# EAGLE board Lamp Logic Board_Combo (EAGLE 9.5.2)
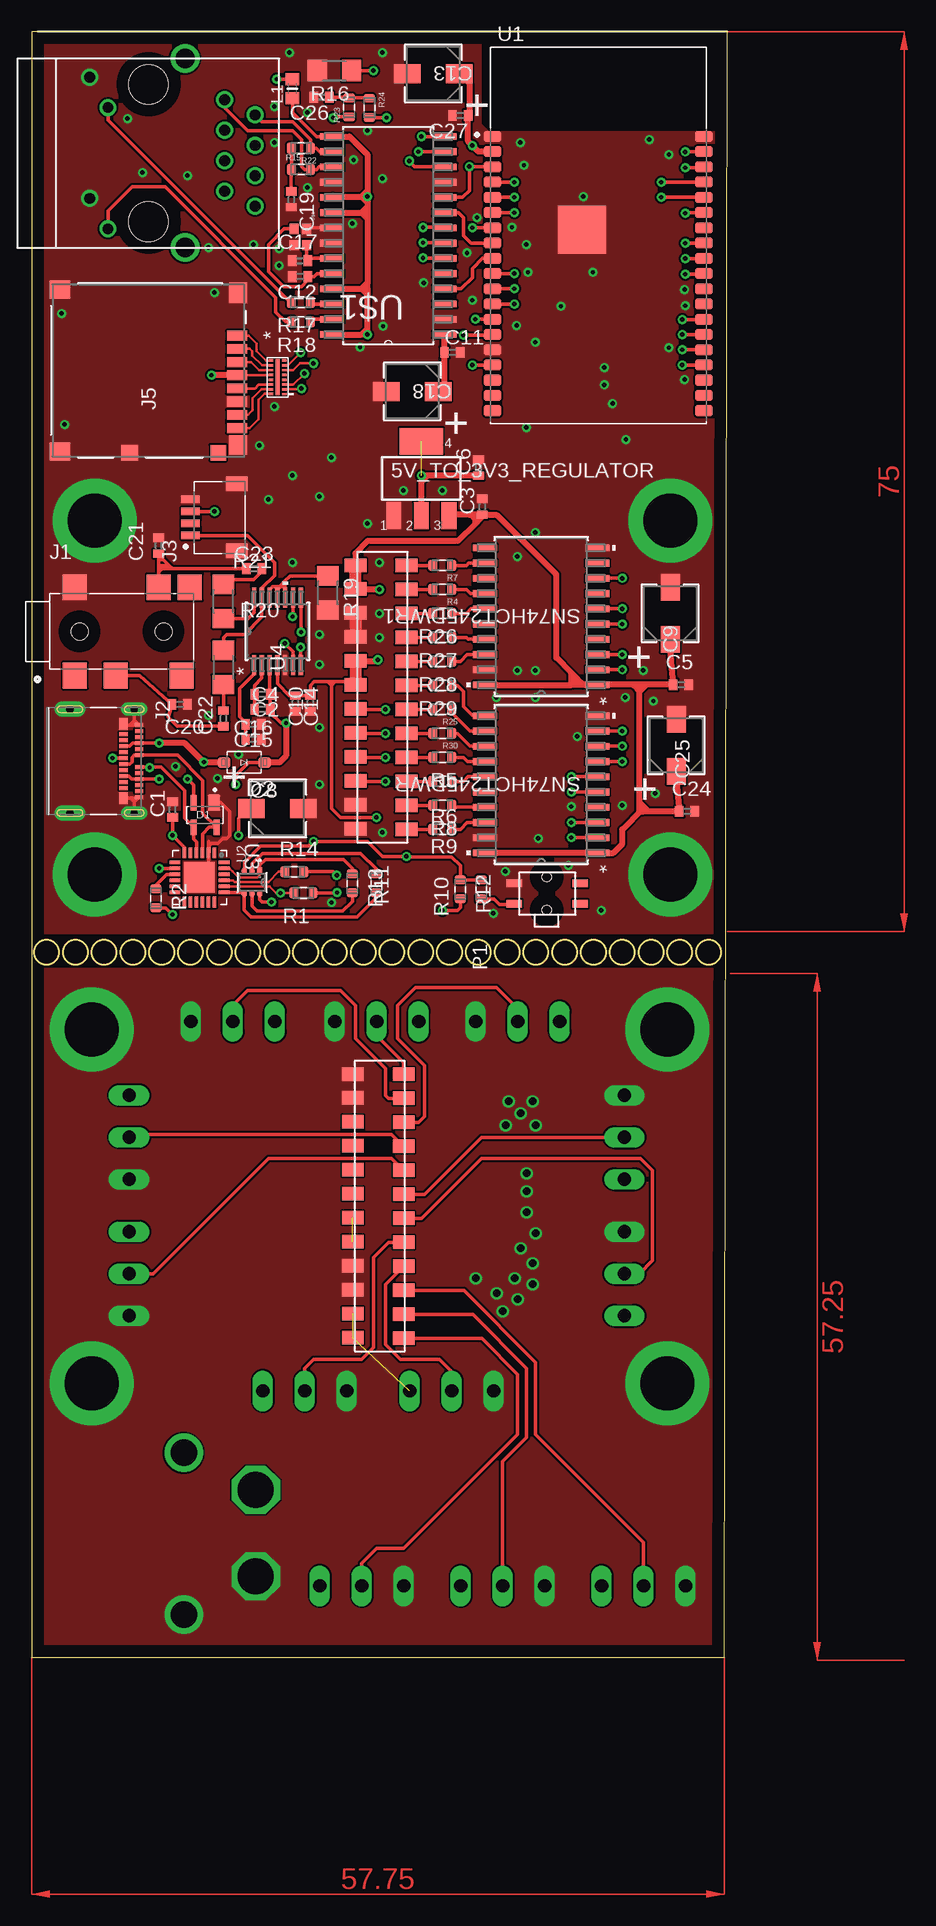
[diagram p0: board, top side]
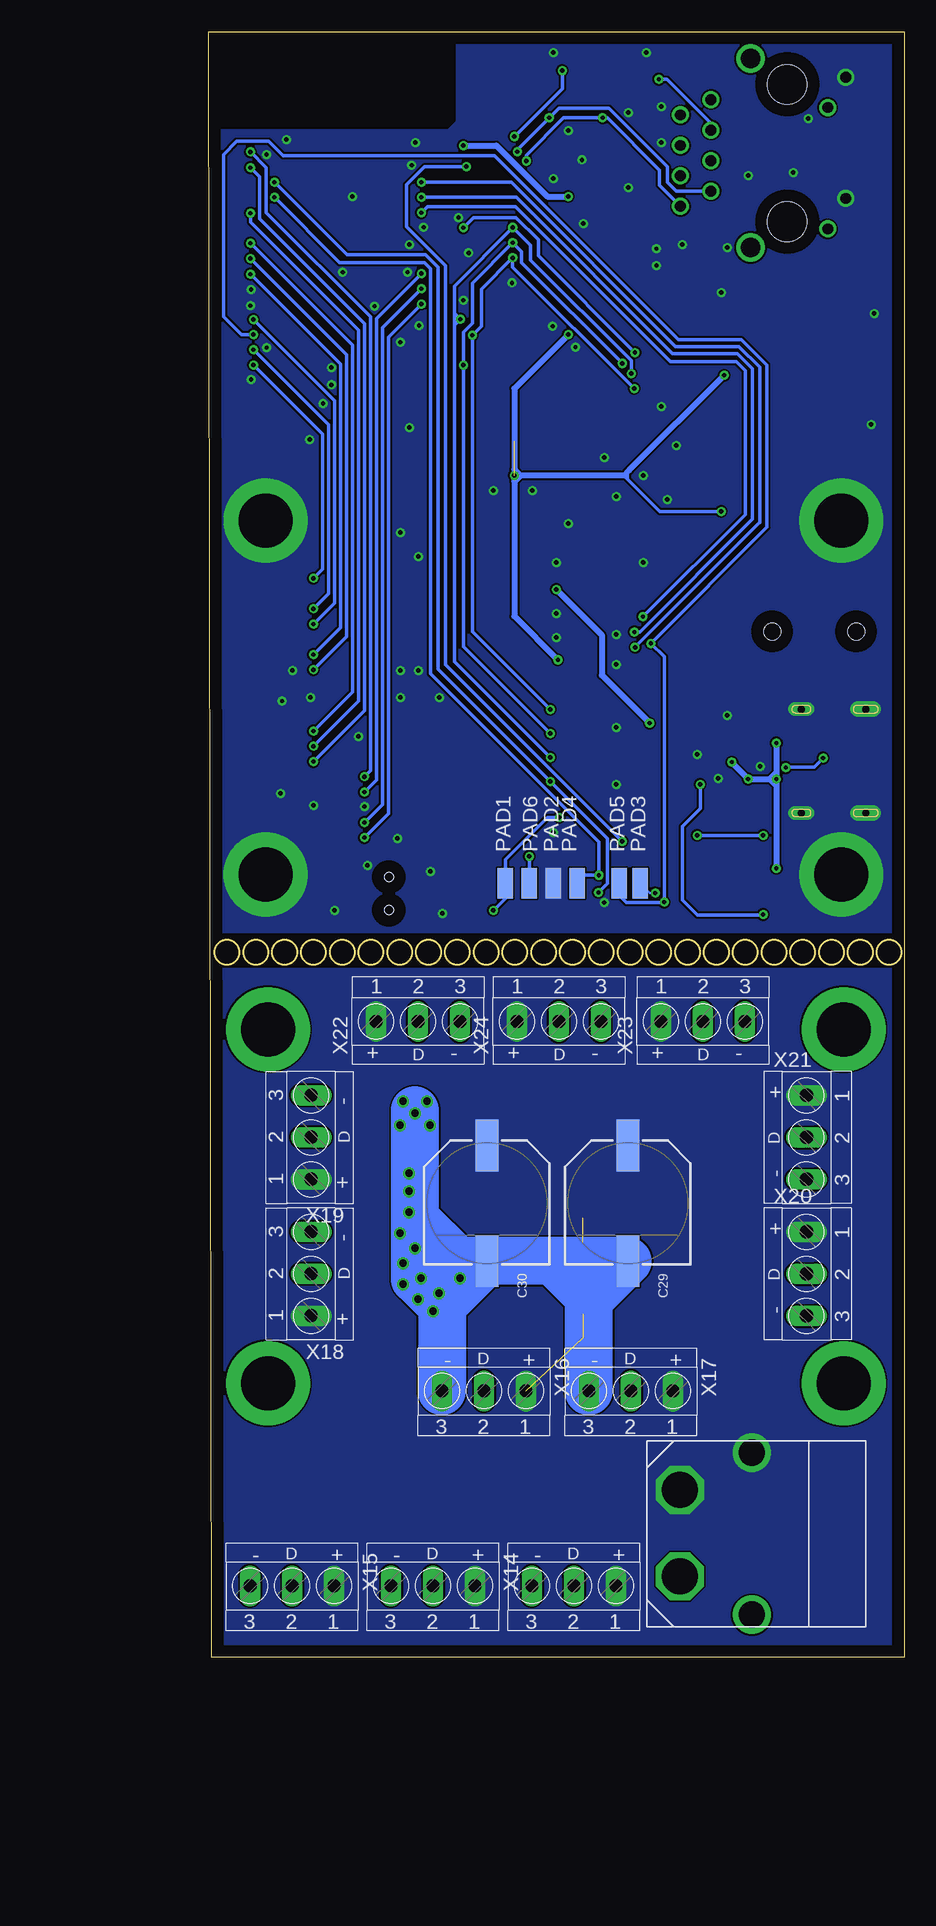
[diagram p1: board, bottom side, seen from below]

Size 58 x 135.5 mm. Coordinates in mm from the lower left corner, seen from the top.
Outline: 0,0 57.75,0 58,135.5 0,135.5 0,0
Copper layers (1*16): Top 0.035mm / dielectric 1.5mm / Bottom 0.035mm
Design rules "default": minimum track width 6mil, minimum drill 0.35mm, track to track 6mil, track to pad 6mil, pad to pad 6mil, via to via 6mil, smd to smd 6mil, copper to edge 40mil, drill to drill 6mil, minimum pad ring 10mil, minimum via ring 8mil, stop-mask expansion 4mil, vias tented up to drill 0mil, thermal gap 10mil
Net classes: 1 LED Data: width 0.305 mm, drill 0.25 mm
Milling: area 0.2,57.7 to 2.3,59.8; area 0.2,57.7 to 2.3,59.8; area 2.6,57.7 to 4.7,59.8; area 5,57.7 to 7.1,59.8; area 7.4,57.7 to 9.5,59.8; area 9.8,57.7 to 11.9,59.8; area 12.2,57.7 to 14.3,59.8; area 14.6,57.7 to 16.7,59.8; area 17,57.7 to 19.1,59.8; area 19.4,57.7 to 21.5,59.8; area 21.8,57.7 to 23.9,59.8; area 24.2,57.7 to 26.3,59.8; 13 more areas

## Footprints (pad centres in the part's own frame; a part is rotated, then mirrored left to right if it is on the bottom)
SOT223 = smd 1.219 x 2.235: 1 -2.311,-3.099; 2 0,-3.099; 3 2.311,-3.099 | smd 3.6 x 2.2: 4 0,3.099
C0402 = smd 0.7 x 0.9: 1 -0.65,0; 2 0.65,0
CAP_EEFC_B = smd 2.21 x 1.575: 1 -2.159,0; 2 2.159,0
CSV-G = smd 4.318 x 1.93: + -4.826,0; - 4.826,0
SOT143 = smd 0.99 x 1.3: 1 -0.76,-1.025 | smd 0.59 x 1.3: 2 0.96,-1.025; 3 0.96,1.025; 4 -0.96,1.025
SOD-123 = smd 1.02 x 0.86: A 1.68,0; C -1.68,0
CUI_SJ2-35894D-SMT-TR = smd 2 x 2.15: 1 -3.9,-3.675; 2 3.1,3.675; 3 -0.5,-3.675; 4 -3.9,3.675; 10 5.7,3.675; 11 5,-3.675 | hole 1.4: -3.5,0; 3.5,0
MOLEX_105450-0101 = smd 0.3 x 0.7: A1 -3,3.77; A2 -2.5,3.77; A3 -2,3.77; A4 -1.5,3.77; A5 -1,3.77; A6 -0.5,3.77; A7 0.5,3.77; A8 1,3.77; A9 1.5,3.77; A10 2,3.77; A11 2.5,3.77; A12 3,3.77; B2 2.25,2.47; B3 1.75,2.47; B4 1.25,2.47; B5 0.75,2.47; B6 0.25,2.47; B7 -0.25,2.47; B8 -0.75,2.47; B9 -1.25,2.47; B10 -1.75,2.47; B11 -2.25,2.47 | smd 1 x 0.7: B1 3.1,2.47; B12 -3.1,2.47 | drill 0.6 pad 1.1 long: S1 -4.32,3.36; S2 4.32,3.36 | drill 0.6 pad 1.3 long: S3 -4.32,-2; S4 4.32,-2
JST_SM04B-SRSS-TB(LF)(SN) = smd 0.6 x 1.55: 1 -1.5,0; 2 -0.5,0; 3 0.5,0; 4 1.5,0 | smd 1.2 x 1.8: S1 -2.8,-3.875; S2 2.8,-3.875
CON00218_8 = smd 0.813 x 1.676: 1 2.899,-7.387; 2 1.799,-7.387; 3 0.699,-7.387; 4 -0.401,-7.387; 5 -1.501,-7.387; 6 -2.601,-7.387; 7 -3.701,-7.387; 8 -4.801,-7.387 | smd 1.499 x 1.702: 9 -6.751,7.374; 10 6.751,7.374 | smd 1.295 x 1.397: 11 -6.859,1.577 | smd 1.295 x 1.295: 12 -6.859,-5.823 | smd 1.6 x 1.499: 13 -6.201,-7.476 | smd 1.702 x 1.499: 14 6.449,-7.476
L0603 = smd 1 x 1.1: 1 -0.794,0; 2 0.794,0
WIZNET_RB1-125BAG1A = drill 0.9: L1 6.325,-3.38; L2 3.784,-4.899; L3 -3.786,-3.379; L4 -6.325,-4.9 | drill 0.9 pad 1.3: R1 -4.446,6.349; R2 -3.176,8.889; R3 -1.906,6.349; R4 -0.636,8.889; R5 0.634,6.349; R6 1.904,8.889; R7 3.174,6.349; R8 4.444,8.889 | drill 1.6 pad 2.184: S1 -7.876,3.049; S2 7.874,3.049 | hole 3.3: 5.714,-0.001; -5.716,-0.001
SMD1,27-2,54 = smd 1.27 x 2.54: 1 0,0
RES_0603 = smd 0.74 x 0.93: 1 -0.795,0; 2 0.795,0
R1206 = smd 1.6 x 1.803: 1 -1.422,0; 2 1.422,0
DW20 = smd 1.981 x 0.559: 1 -4.686,5.715; 2 -4.686,4.445; 3 -4.686,3.175; 4 -4.686,1.905; 5 -4.686,0.635; 6 -4.686,-0.635; 7 -4.686,-1.905; 8 -4.686,-3.175; 9 -4.686,-4.445; 10 -4.686,-5.715; 11 4.686,-5.715; 12 4.686,-4.445; 13 4.686,-3.175; 14 4.686,-1.905; 15 4.686,-0.635; 16 4.686,0.635; 17 4.686,1.905; 18 4.686,3.175; 19 4.686,4.445; 20 4.686,5.715
XCVR_ESP32-WROVER-I = smd 1.45 x 0.93: 1 -8.81,8.26; 2 -8.81,6.99; 3 -8.81,5.72; 4 -8.81,4.45; 5 -8.81,3.18; 6 -8.81,1.91; 7 -8.81,0.64; 8 -8.81,-0.63; 9 -8.81,-1.9; 10 -8.81,-3.17; 11 -8.81,-4.44; 12 -8.81,-5.71; 13 -8.81,-6.98; 14 -8.81,-8.25; 15 -8.81,-9.52; 16 -8.81,-10.79; 17 -8.81,-12.06; 18 -8.81,-13.33; 19 -8.81,-14.6; 20 8.81,-14.6; 21 8.81,-13.33; 22 8.81,-12.06; 23 8.81,-10.79; 24 8.81,-9.52; 25 8.81,-8.25; 26 8.81,-6.98; 27 8.81,-5.71; 28 8.81,-4.44; 29 8.81,-3.17; 30 8.81,-1.9; 31 8.81,-0.63; 32 8.81,0.64; 33 8.81,1.91; 34 8.81,3.18; 35 8.81,4.45; 36 8.81,5.72; 37 8.81,6.99; 38 8.81,8.26 | smd 4 x 4: 39 -1.38,0.47
SILABS_CP2102N-A02-GQFN24R = smd 0.9 x 0.3: 1 -1.55,1.75; 2 -1.55,1.25; 3 -1.55,0.75; 4 -1.55,0.25; 5 -1.55,-0.25; 6 -1.55,-0.75; 13 2.55,-0.75; 14 2.55,-0.25; 15 2.55,0.25; 16 2.55,0.75; 17 2.55,1.25; 18 2.55,1.75 | smd 0.3 x 0.9: 7 -0.75,-1.55; 8 -0.25,-1.55; 9 0.25,-1.55; 10 0.75,-1.55; 11 1.25,-1.55; 12 1.75,-1.55; 19 1.75,2.55; 20 1.25,2.55; 21 0.75,2.55; 22 0.25,2.55; 23 -0.25,2.55; 24 -0.75,2.55 | smd 2.55 x 2.55: 25 0.5,0.5
SOT-363 = smd 0.6 x 0.42: 1 -0.95,0.65; 2 -0.95,0; 3 -0.95,-0.65; 4 0.95,-0.65; 5 0.95,0; 6 0.95,0.65
PW14 = smd 1.676 x 0.356: 1 -2.819,1.95; 2 -2.819,1.3; 3 -2.819,0.65; 4 -2.819,0; 5 -2.819,-0.65; 6 -2.819,-1.3; 7 -2.819,-1.95; 8 2.819,-1.95; 9 2.819,-1.3; 10 2.819,-0.65; 11 2.819,0; 12 2.819,0.65; 13 2.819,1.3; 14 2.819,1.95
SOIC127P1034X264-28N = smd 1.981 x 0.559: 1 -4.699,8.255; 2 -4.699,6.985; 3 -4.699,5.715; 4 -4.699,4.445; 5 -4.699,3.175; 6 -4.699,1.905; 7 -4.699,0.635; 8 -4.699,-0.635; 9 -4.699,-1.905; 10 -4.699,-3.175; 11 -4.699,-4.445; 12 -4.699,-5.715; 13 -4.699,-6.985; 14 -4.699,-8.255; 15 4.699,-8.255; 16 4.699,-6.985; 17 4.699,-5.715; 18 4.699,-4.445; 19 4.699,-3.175; 20 4.699,-1.905; 21 4.699,-0.635; 22 4.699,0.635; 23 4.699,1.905; 24 4.699,3.175; 25 4.699,4.445; 26 4.699,5.715; 27 4.699,6.985; 28 4.699,8.255
CM1624-08DE = smd 0.2 x 0.4: CLK 1.075,1.3; CMD 2.275,1.3; DATA0 0.675,1.3; DATA1 0.3,1.3; DATA2 3.075,1.3; DATA3 2.675,1.3; ESD1 1.475,1.3; ESD2 1.475,0.175; ESD3 1.875,0.175; SDCLK 1.075,0.175; SDCMD 2.275,0.175; SDDATA0 0.675,0.175; SDDATA1 0.275,0.175; SDDATA2 3.075,0.175; SDDATA3 2.675,0.175; VCC 1.875,1.3 | smd 3 x 0.35: GND 1.7,0.725
ECS-250-10-37B-CTN-TR = smd 0.85 x 0.75: 1 0.45,0.4; 2 1.8,0.4; 3 1.8,1.45; 4 0.45,1.45
QUICKFIT_RISER_THING = drill 4.5 pad 7: P$1 0,0
TL1014BF160QG = smd 1.27 x 0.635: P$1 0,0; P$2 5.5,0; P$3 0,-1.7; P$4 5.5,-1.7 | hole 0.75: 2.7,0.525; 2.7,-2.225
MY_HEADER = smd 1.12 x 1.83: P$1 -2,0; P$2 0.005,0; P$3 2.005,0; P$4 4.005,0; P$5 6.005,0; P$6 8.005,0; P$7 10.005,0; P$8 12.005,0; P$9 14.005,0; P$10 16.005,0; P$11 18.005,0; P$12 20.005,0; P$13 -2,-4.25; P$14 -0.045,-4.25; P$15 1.955,-4.25; P$16 3.955,-4.25; P$17 5.955,-4.25; P$18 7.955,-4.25; P$19 9.955,-4.25; P$20 11.955,-4.25; P$21 13.955,-4.25; P$22 15.955,-4.25; P$23 17.955,-4.25; P$24 19.955,-4.25
4,PIECE = drill 4.5 pad 7: P$1 0,0; P$2 48,29.5; P$3 0,29.5; P$4 48,0
XT60 = drill 3 octagon: + 4.1,2.75; - 11.3,2.75 | drill 2.184 pad 2.438: +_HOLE 1,8.75 | drill 2.184 pad 2.413: -_HOLE 14.5,8.75
TERMINAL-BLOCK-3-PIN-3.5MM-LONG-PAD = drill 1.1 pad 1.7 long: 1 -3.5,-0.1; 2 0,-0.1; 3 3.5,-0.1

## Placement (x,y rotation side)
5V_TO_3V3_REGULATOR  [SOT223]  32.5,98.25 0 top
C1  0.1uF  [C0402]  11.76,70.64 90 top
C2  1uF  [C0402]  19.25,79 0 top
C3  1uF  [C0402]  37.58,95.88 90 top
C4  0.1uF  [C0402]  19.25,80.25 0 top
C5  0.1uF  [C0402]  54.15,81.05 0 top
C6  1uF  [C0402]  37.26,99.13 90 top
C8  1uF  [CAP_EEFC_B]  20.5,70.75 0 top
C9  1uF  [CAP_EEFC_B]  53.25,87 90 top
C10  1uF  [C0402]  22,79.5 270 top
C11  10uF  [C0402]  35.08,108.76 0 top
C12  6pF  [C0402]  22.4,115.08 180 top
C13  100uF  [CAP_EEFC_B]  33.5,132 180 top
C14  0.1uF  [C0402]  23.25,79.5 270 top
C15  1uF  [C0402]  18.5,76.5 180 top
C16  0.1uF  [C0402]  18.5,77.75 180 top
C17  6pF  [C0402]  22.39,116.39 180 top
C18  100uF  [CAP_EEFC_B]  31.75,105.5 180 top
C19  0.1uF  [C0402]  21.66,121.51 270 top
C20  0.1uF  [C0402]  12.36,79.42 0 top
C21  0.1uF  [C0402]  10.59,92.64 90 top
C22  1uF  [C0402]  16,78.25 90 top
C23  1uF  [C0402]  18.55,90.72 0 top
C24  0.1uF  [C0402]  54.65,70.5 0 top
C25  1uF  [CAP_EEFC_B]  53.75,76 90 top
C26  0.1uF  [C0402]  24.18,130.03 180 top
C27  1uF  [C0402]  35.75,128.5 180 top
C29  1000uF  [CSV-G]  23.04,37.83 270 bottom
C30  1000uF  [CSV-G]  34.79,37.83 270 bottom
D1  SP0503BAHTG  [SOT143]  14.47,70.2 180 top
D2  STPS1L60ZFY  [SOD-123]  17.74,74.58 180 top
J1  SJ2-35894D-SMT-TR  [CUI_SJ2-35894D-SMT-TR]  7.5,85.5 0 top
J2  105450-0101  [MOLEX_105450-0101]  5.2,74.69 270 top
J3  SM04B-SRSS-TB(LF)(SN)  [JST_SM04B-SRSS-TB(LF)(SN)]  13.25,95 90 top
J5  LLC  [CON00218_8]  9.75,107.25 90 top
L1  EXC3BP  [L0603]  21.75,130.75 90 top
P1  RB1-125BAG1A  [WIZNET_RB1-125BAG1A]  9.75,125.38 270 top
PAD1  VCC  [SMD1,27-2,54]  33.25,64.5 0 bottom
PAD2  GND  [SMD1,27-2,54]  29.25,64.5 0 bottom
PAD3  TX  [SMD1,27-2,54]  22,64.5 0 bottom
PAD4  RX  [SMD1,27-2,54]  27.25,64.5 0 bottom
PAD5  DTR  [SMD1,27-2,54]  23.75,64.5 0 bottom
PAD6  RTS  [SMD1,27-2,54]  31.25,64.5 0 bottom
R1  330  [RES_0603]  22.68,63.7 180 top
R2  12k  [RES_0603]  10.38,63.25 270 top
R4  330  [RES_0603]  34.25,89 180 top
R5  330  [RES_0603]  34.25,75 180 top
R6  330  [RES_0603]  34.25,73 180 top
R7  330  [RES_0603]  34.25,91 180 top
R8  330  [RES_0603]  34.25,71 180 top
R9  330  [RES_0603]  34.25,69 180 top
R10  330  [RES_0603]  37.5,64 270 top
R11  12k  [RES_0603]  28.75,64.5 270 top
R12  12k  [RES_0603]  35.75,64 270 top
R13  12k  [RES_0603]  26.75,64.5 270 top
R14  330  [RES_0603]  21.91,65.47 0 top
R15  330  [RES_0603]  22.47,124 0 top
R16  2.32k  [R1206]  25.25,132.25 180 top
R17  330  [RES_0603]  22.46,112.94 180 top
R18  330  [RES_0603]  22.47,111.3 180 top
R19  10k  [R1206]  24.71,88.7 270 top
R20  75  [R1206]  16,82.5 90 top
R21  75  [R1206]  16,88 270 top
R22  330  [RES_0603]  22.47,125.78 180 top
R23  330  [RES_0603]  26.48,129.18 90 top
R24  330  [RES_0603]  28.18,129.15 270 top
R25  330  [RES_0603]  34.25,79 180 top
R26  330  [RES_0603]  34.25,87 180 top
R27  330  [RES_0603]  34.25,85 180 top
R28  330  [RES_0603]  34.25,83 180 top
R29  330  [RES_0603]  34.25,81 180 top
R30  330  [RES_0603]  34.25,77 180 top
SN74HCT245DWR  SN74HCT245DWR  [DW20]  42.5,72.75 180 top
SN74HCT245DWR1  SN74HCT245DWR  [DW20]  42.5,86.75 180 top
U1  ESP32-WROVER-IB  [XCVR_ESP32-WROVER-I]  47.25,118.5 0 top
U2  CP2102N-A02-GQFN24R  [SILABS_CP2102N-A02-GQFN24R]  13.5,65.5 270 top
U3  MMDT3904-7-F  [SOT-363]  18.38,64.59 270 top
U4  PCM1808PWR  [PW14]  20.5,85.5 90 top
U$1  ENC28J60/SO  [SOIC127P1034X264-28N]  29.75,118.5 180 top
U$2  CM1624-08DE  [CM1624-08DE]  21.25,105 90 top
U$3  ECS-250-10-37B-CTN-TR  [ECS-250-10-37B-CTN-TR]  21.5,119.5 270 top
U$4  QUICKFIT_RISER_THING  [QUICKFIT_RISER_THING]  5.25,65.25 0 top
U$5  QUICKFIT_RISER_THING  [QUICKFIT_RISER_THING]  5.25,94.75 0 top
U$6  QUICKFIT_RISER_THING  [QUICKFIT_RISER_THING]  53.25,94.75 0 top
U$7  TL1014BF160QG  [TL1014BF160QG]  40.25,64.5 0 top
U$8  QUICKFIT_RISER_THING  [QUICKFIT_RISER_THING]  53.25,65.25 0 top
U$9  MY_HEADER  [MY_HEADER]  31.25,89 270 top
U$13,U$14  POWERBOARD_TEMPLATEPOWERBOARD_TEMPLATE  [4,PIECE]  5.04,52.33 180 bottom
U$14  MY_HEADER  [MY_HEADER]  31.04,46.58 270 top
U$15  XT60  [XT60]  21.45,18.04 270 bottom
X13  TERMINAL-BLOCK-3.5MM-3-PIN-LONG-PAD  [TERMINAL-BLOCK-3-PIN-3.5MM-LONG-PAD]  27.54,5.83 180 bottom
X14  TERMINAL-BLOCK-3.5MM-3-PIN-LONG-PAD  [TERMINAL-BLOCK-3-PIN-3.5MM-LONG-PAD]  39.29,5.83 180 bottom
X15  TERMINAL-BLOCK-3.5MM-3-PIN-LONG-PAD  [TERMINAL-BLOCK-3-PIN-3.5MM-LONG-PAD]  51.04,5.83 180 bottom
X16  TERMINAL-BLOCK-3.5MM-3-PIN-LONG-PAD  [TERMINAL-BLOCK-3-PIN-3.5MM-LONG-PAD]  35.04,22.08 180 bottom
X17  TERMINAL-BLOCK-3.5MM-3-PIN-LONG-PAD  [TERMINAL-BLOCK-3-PIN-3.5MM-LONG-PAD]  22.79,22.08 180 bottom
X18  TERMINAL-BLOCK-3.5MM-3-PIN-LONG-PAD  [TERMINAL-BLOCK-3-PIN-3.5MM-LONG-PAD]  49.54,31.96 90 bottom
X19  TERMINAL-BLOCK-3.5MM-3-PIN-LONG-PAD  [TERMINAL-BLOCK-3-PIN-3.5MM-LONG-PAD]  49.54,43.33 90 bottom
X20  TERMINAL-BLOCK-3.5MM-3-PIN-LONG-PAD  [TERMINAL-BLOCK-3-PIN-3.5MM-LONG-PAD]  8.04,31.96 270 bottom
X21  TERMINAL-BLOCK-3.5MM-3-PIN-LONG-PAD  [TERMINAL-BLOCK-3-PIN-3.5MM-LONG-PAD]  8.04,43.33 270 bottom
X22  TERMINAL-BLOCK-3.5MM-3-PIN-LONG-PAD  [TERMINAL-BLOCK-3-PIN-3.5MM-LONG-PAD]  40.54,53.08 0 bottom
X23  TERMINAL-BLOCK-3.5MM-3-PIN-LONG-PAD  [TERMINAL-BLOCK-3-PIN-3.5MM-LONG-PAD]  16.79,53.08 0 bottom
X24  TERMINAL-BLOCK-3.5MM-3-PIN-LONG-PAD  [TERMINAL-BLOCK-3-PIN-3.5MM-LONG-PAD]  28.79,53.08 0 bottom

## Library data of the parts
5V_TO_3V3_REGULATOR = lm1117; MF: Texas Instruments; MPN: LM1117MP-1.8; OC_FARNELL: 1469053; OC_NEWARK: 41K3467
C1-C4 C6 C10-C12 C14-C17 C19 C22 C23 C26 C27 R16 R19-R21 = resistor
C5 C20 C21 C24 = adafruit
C8 C9 C13 C18 C25 = EEE-FC1V1R0R; MANUFACTURER_PART_NUMBER: EEEFC1V1R0R; VENDOR: Panasonic
C29 C30 = rc-master-smd
D1 = SP0503BAHTG; DESCRIPTION: SP050xBA Series 8 V 30 pF Uni-Directional SMT TVS Avalanche Diode Array SOT-143; DIGI-KEY_PART_NUMBER: F2715CT-ND; DIGI-KEY_PURCHASE_URL: https://www.digikey.com/product-detail/en/littelfuse-inc/SP0503BAHTG/F2715CT-ND/1154322?utm_source=snapeda&utm_medium=aggregator&utm_campaign=symbol; MF: Littelfuse Inc.; MP: SP0503BAHTG; PACKAGE: SOT-143 Littelfuse
D2 = Diodes; CREATED_BY: PCBLayout.com; DIGIKEY_PART_NUMBER: MBR0520LT1GOSTR-ND; MANUFACTURER: ON Semiconductor; MPN: MBR0520LT1G; PACKAGE: SOD-123
J1 = SJ2-35894D-SMT-TR; CUI_PURCHASE_URL: https://www.cui.com/product/interconnect/connectors/audio-connectors/jacks/sj2-3589x-smt-series?utm_source=snapeda.com&utm_medium=referral&utm_campaign=snapedaBOM; DESCRIPTION: 3.5 mm, Stereo, Right Angle, Surface Mount _SMT_, Audio Jack Connector; DIGI-KEY_PART_NUMBER: CP-SJ2-35894D-SMT-CT-ND; DIGI-KEY_PURCHASE_URL: https://www.digikey.com/product-detail/en/cui-inc/SJ2-35894D-SMT-TR/CP-SJ2-35894D-SMT-CT-ND/6619623?utm_source=snapeda&utm_medium=aggregator&utm_campaign=symbol; MF: CUI Inc.; MP: SJ2-35894D-SMT-TR; PACKAGE: None
J2 = 105450-0101; DESCRIPTION: USB Shielded I/O Receptacle; Type C; Right Angle; Surface Mount; Gold over Nickel; DIGI-KEY_PART_NUMBER: WM12856CT-ND; DIGI-KEY_PURCHASE_URL: https://www.digikey.com/product-detail/en/molex/1054500101/WM12856CT-ND/5843891?utm_source=snapeda&utm_medium=aggregator&utm_campaign=symbol; MF: Molex; MP: 1054500101; PACKAGE: None
J3 = SM04B-SRSS-TB_LF__SN_; AVAILABILITY: Unavailable; DESCRIPTION: SH Series 1.0 mm Pitch 2 Position Single Row Side Entry Shrouded Header; MF: JST Sales; MP: SM04B-SRSS-TB_LF__SN_; PACKAGE: None; PRICE: None
J5 = 5027740891; MANUFACTURER_PART_NUMBER: LLC; VENDOR: Molex Connector Corporation
L1 = ferrite
P1 = RB1-125BAG1A; AVAILABILITY: Unavailable; DESCRIPTION: Accessory RJ-45 With Transformer Connector - UDE; MF: WIZnet; MP: RB1-125BAG1A; PACKAGE: HVQFN-36 NXP Semiconductors; PRICE: None
PAD1-PAD6 = wirepad
R1 R2 R4-R15 R17 R18 R22-R30 = Resistor_Capacitor; CREATED_BY: PCBLayout.com; DIGIKEY_PART_NUMBER: 311-0.0GRTR-ND; MANUFACTURER: Yageo; MPN: RC0603JR-070RL; PACKAGE: SMD 0603
SN74HCT245DWR SN74HCT245DWR1 = SN74HCT245DWR ; MANUFACTURER_PART_NUMBER: SN74HCT245DWR; VENDOR: Texas Instruments
U1 = ESP32-WROVER-I; AVAILABILITY: Unavailable; DESCRIPTION: Module: combo; GPIO, I2C x2, I2S x2, SDIO, SPI x3, UART x3; U.FL; MF: Espressif Systems; MP: ESP32-WROVER-I; PACKAGE: Module Espressif Systems; PRICE: None
U2 = CP2102N-A02-GQFN20R
U3 = MMDT3904; MANUFACTURER_PART_NUMBER: MMDT39047F; VENDOR: Diodes Inc
U4 = PCM1808PWR; MANUFACTURER_PART_NUMBER: PCM1808PWR; VENDOR: Texas Instruments
U$1 = ENC28J60_SO; DESCRIPTION: ENC28J60 Series 3.3 V Stand-Alone Ethernet Controller with SPI Interface-SSOP-28; DIGI-KEY_PART_NUMBER: ENC28J60/SS-ND; DIGI-KEY_PURCHASE_URL: https://www.digikey.com/product-detail/en/microchip-technology/ENC28J60-SS/ENC28J60-SS-ND/857584?utm_source=snapeda&utm_medium=aggregator&utm_campaign=symbol; MF: Microchip; MP: ENC28J60/SS; PACKAGE: SSOP-28 Microchip
U$2 = CM1624-08DE
U$3 = ECS-250-10-37B-CTN-TR
U$4-U$6 U$8 U$13,U$14 = QUICKFIT_RISER_THING
U$7 = TL1014BF160QG
U$9 U$14 = MY_HEADER
U$15 = XT60
X13-X24 = Rembrandt Electronics - Terminal Block 3-5mm v1-0

## Nets
BCK [LED Data]: U1.5 U4.8
CT [LED Data]: L1.2 P1.R3
D+ [LED Data]: D1.4 J2.A6 J2.B6 U2.3
D- [LED Data]: D1.3 J2.A7 J2.B7 U2.4
DOUT [LED Data]: U1.6 U4.9
DTR [LED Data]: R13.1 U2.23 U3.1
EN [LED Data]: PAD6.1 R10.1 R12.1 U1.3 U3.3 U$1.10
ETHER_CS [LED Data]: U1.8 U$1.9
ETHER_INT [LED Data]: U1.9 U$1.4
GND: 5V_TO_3V3_REGULATOR.1 C1.2 C3.2 C5.2 C6.2 C8.2 C9.2 C10.2 C11.2 C12.2 C13.2 C14.2 C15.1 C16.1 C17.2 C18.2 C19.2 C20.2 C21.2 C24.2 C25.2 C26.2 C27.2 D1.1 J1.4 J2.A1 J2.A12 J2.B1 J2.B12 J2.S1 J2.S2 J2.S3 J2.S4 J3.4 J3.S1 J3.S2 J5.6 J5.9 J5.10 J5.11 J5.13 J5.14 P1.L2 P1.L4 PAD2.1 R16.2 R19.2 SN74HCT245DWR1.10 SN74HCT245DWR1.19 SN74HCT245DWR.10 SN74HCT245DWR.19 U1.1 U1.15 U1.38 U1.39 U2.2 U2.25 U4.5 U$1.2 U$1.11 U$1.18 U$1.21 U$1.22 U$3.2 U$3.4 U$4.P$1 U$5.P$1 U$6.P$1 U$7.P$1 U$8.P$1 U$9.P$15 U$9.P$16 U$9.P$23 U$9.P$24
GND_BRD: C29.- C30.- U$13,U$14.P$1 U$13,U$14.P$2 U$13,U$14.P$3 U$13,U$14.P$4 U$14.P$13 U$14.P$14 U$14.P$21 U$14.P$22 U$15.- U$15.-_HOLE X13.3 X14.3 X15.3 X16.3 X17.3 X18.3 X19.3 X20.3 X21.3 X22.3 X23.3 X24.3
HEADER_CS [LED Data]: R1.1 U1.35 U$9.P$22
HEADER_CS_BRD: U$14.P$15
LEDA [LED Data]: P1.L1 R18.2
LEDB [LED Data]: P1.L3 R17.2
LEDS1_3V3 [LED Data]: SN74HCT245DWR1.8 U1.23
LEDS1_5V [LED Data]: R7.2 U$9.P$1
LEDS1_5V_BRD: U$14.P$12 X13.2
LEDS2_3V3 [LED Data]: SN74HCT245DWR1.6 U1.24
LEDS2_5V [LED Data]: R4.2 U$9.P$2
LEDS2_5V_BRD: U$14.P$11 X14.2
LEDS3_3V3 [LED Data]: SN74HCT245DWR1.5 U1.26
LEDS3_5V [LED Data]: R26.2 U$9.P$3
LEDS3_5V_BRD: U$14.P$10 X15.2
LEDS4_3V3 [LED Data]: SN74HCT245DWR1.3 U1.29
LEDS4_5V [LED Data]: R27.2 U$9.P$4
LEDS4_5V_BRD: U$14.P$9 X16.2
LEDS5_3V3 [LED Data]: SN74HCT245DWR1.2 U1.30
LEDS5_5V [LED Data]: R28.2 U$9.P$5
LEDS5_5V_BRD: U$14.P$8 X17.2
LEDS6_3V3 [LED Data]: SN74HCT245DWR.9 U1.31
LEDS6_5V [LED Data]: R29.2 U$9.P$6
LEDS6_5V_BRD: U$14.P$7 X18.2
LEDS7_3V3 [LED Data]: SN74HCT245DWR.8 U1.33
LEDS7_5V [LED Data]: R25.2 U$9.P$7
LEDS7_5V_BRD: U$14.P$6 X19.2
LEDS8_3V3 [LED Data]: SN74HCT245DWR.7 U1.36
LEDS8_5V [LED Data]: R30.2 U$9.P$8
LEDS8_5V_BRD: U$14.P$5 X20.2
LEDS9_3V3 [LED Data]: SN74HCT245DWR.6 U1.37
LEDS9_5V [LED Data]: R5.2 U$9.P$9
LEDS9_5V_BRD: U$14.P$4 X21.2
LEDS10_3V3 [LED Data]: SN74HCT245DWR.5 U1.10
LEDS10_5V [LED Data]: R6.2 U$9.P$10
LEDS10_5V_BRD: U$14.P$3 X22.2
LEDS11_3V3 [LED Data]: SN74HCT245DWR.3 U1.11
LEDS11_5V [LED Data]: R8.2 U$9.P$11
LEDS11_5V_BRD: U$14.P$2 X23.2
LEDS12_3V3 [LED Data]: SN74HCT245DWR.2 U1.12
LEDS12_5V [LED Data]: R9.2 U$9.P$12
LEDS12_5V_BRD: U$14.P$1 X24.2
LEFT_CHANNEL [LED Data]: R21.2 U4.14
LRCK [LED Data]: U1.4 U4.7
MIC [LED Data]: J1.1
MISO [LED Data]: U1.14 U$1.6 U$2.SDDATA0 U$9.P$19
MISO_BRD: U$14.P$18
MOSI [LED Data]: U1.16 U$1.7 U$2.SDCMD U$9.P$20
MOSI_BRD: U$14.P$17
N$1 [LED Data]: R9.1 SN74HCT245DWR.18
N$2 [LED Data]: C2.1 C4.1 U4.2
N$3 [LED Data]: C20.1 C22.1 J1.3
N$4 [LED Data]: C21.1 C23.1 J1.2
N$5 [LED Data]: C1.1 C8.1 U2.6
N$6 [LED Data]: R7.1 SN74HCT245DWR1.12
N$7 [LED Data]: R11.1 U3.2
N$8 [LED Data]: R13.2 U3.5
N$9: R10.2 U$7.P$3
N$10 [LED Data]: R28.1 SN74HCT245DWR1.18
N$11 [LED Data]: R6.1 SN74HCT245DWR.15
N$12 [LED Data]: R5.1 SN74HCT245DWR.14
N$13 [LED Data]: R27.1 SN74HCT245DWR1.17
N$14 [LED Data]: R8.1 SN74HCT245DWR.17
N$15 [LED Data]: R26.1 SN74HCT245DWR1.15
N$16 [LED Data]: C22.2 R20.1
N$17 [LED Data]: C15.2 C16.2 U4.1
N$18 [LED Data]: R14.1 U2.21
N$19 [LED Data]: C11.1 C18.1 U$1.1
N$20 [LED Data]: R16.1 U$1.14
N$21 [LED Data]: C12.1 U$1.24 U$3.1
N$22 [LED Data]: C17.1 U$1.23 U$3.3
N$23 [LED Data]: R17.1 U$1.26
N$24 [LED Data]: C23.2 R21.1
N$25 [LED Data]: R18.1 U$1.27
N$26 [LED Data]: R29.1 SN74HCT245DWR.11
N$27 [LED Data]: R4.1 SN74HCT245DWR1.14
N$28 [LED Data]: R2.1 U2.9
N$30 [LED Data]: R19.1 U4.10 U4.11 U4.12
N$31 [LED Data]: C26.1 R23.2 R24.1
N$32 [LED Data]: C19.1 R15.1 R22.2
N$34 [LED Data]: R30.1 SN74HCT245DWR.13
N$35 [LED Data]: R25.1 SN74HCT245DWR.12
RIGHT_CHANNEL [LED Data]: J3.1 R20.2 U4.13
RIGHT_GAIN [LED Data]: J3.2
RTS [LED Data]: R11.2 U2.19 U3.4
RX0 [LED Data]: PAD4.1 R14.2 U1.34
SCK [LED Data]: U1.13 U$1.8 U$2.SDCLK U$9.P$21
SCK_BRD: U$14.P$16
SCKI [LED Data]: PAD5.1 U1.25 U3.6 U4.6
SD_CMD [LED Data]: J5.3 U$2.CMD
SD_CS [LED Data]: U1.7 U$2.SDDATA3
SD_D0 [LED Data]: J5.7 U$2.DATA0
SD_D1 [LED Data]: J5.8 U$2.DATA1
SD_D2 [LED Data]: J5.1 U$2.DATA2
SD_D3 [LED Data]: J5.2 U$2.DATA3
SD_SCK [LED Data]: J5.5 U$2.CLK
TPIN+ [LED Data]: P1.R7 R24.2 U$1.13
TPIN- [LED Data]: P1.R8 R23.1 U$1.12
TPOUT+ [LED Data]: P1.R1 R15.2 U$1.17
TPOUT- [LED Data]: P1.R2 R22.1 U$1.16
TX_CONTROLLER [LED Data]: PAD3.1 R1.2 U2.20
VDD3V3: 5V_TO_3V3_REGULATOR.2 5V_TO_3V3_REGULATOR.4 C6.1 C10.1 C13.1 C14.1 C27.1 J3.3 J5.4 L1.1 PAD1.1 R12.2 U1.2 U4.4 U$1.15 U$1.19 U$1.20 U$1.25 U$1.28 U$2.VCC U$9.P$17 U$9.P$18
VDD3V3_BRD: U$14.P$19 U$14.P$20
VDD5V: 5V_TO_3V3_REGULATOR.3 C2.2 C3.1 C4.2 C5.1 C9.1 C24.1 C25.1 D2.C R2.2 SN74HCT245DWR1.1 SN74HCT245DWR1.20 SN74HCT245DWR.1 SN74HCT245DWR.20 U4.3 U$9.P$13 U$9.P$14
VDD5V_BRD: C29.+ C30.+ U$14.P$23 U$14.P$24 U$15.+ U$15.+_HOLE X13.1 X14.1 X15.1 X16.1 X17.1 X18.1 X19.1 X20.1 X21.1 X22.1 X23.1 X24.1
VDD5VUSB: D1.2 D2.A J2.A4 J2.A9 J2.B4 J2.B9 U2.8
VREGIN [LED Data]: U2.7

## Tracks (layer width: path | path; a pad name or v marks a point on that pad's centre or on a via)
BCK  (via drill 0.35)
  Top 0.305: U1.5 v40.25,121.68 | v22.48,85.45 22.48,88.29 U4.8
  Bottom 0.305: v40.25,121.68 32.33,121.68 19.3,108.65 13.9,108.65 12.65,107.4 12.65,94.85 22.05,85.45 v22.48,85.45
CT  (via drill 0.35 pad 0.4)
  Top 0.305: L1.2 v20.44,131.53
  Bottom 0.305: P1.R3 16.1,127.85 19.78,131.53 v20.44,131.53
D+
  Top 0.305: U2.3 14.25,68.63 14.8,69.18 D1.4 14.28,70.32 14.28,73.07 12.17,75.19 J2.A6 8.56,75.19 8.37,75 8.37,74.62 8.19,74.44 J2.B6
D-  (via drill 0.35)
  Top 0.305: U2.4 13.75,67.93 13.51,68.18 D1.3 12.76,69.93 12.76,72.24 10.81,74.19 J2.A7 9.81,74.19 v9.85,74.15 | J2.B7 v6.75,74.94
  Bottom 0.305: v6.75,74.94 7.5,74.19 9.81,74.19 v9.85,74.15
DOUT  (via drill 0.35)
  Top 0.305: U1.6 v40.25,120.41 | U4.9 21.82,88.3 21.82,86.78 v21.77,86.73
  Bottom 0.305: v40.25,120.41 39.75,120.91 32.41,120.91 19.5,108 14,108 13.25,107.25 13.25,95.25 v21.77,86.73
DTR
  Top 0.2: 16.75,65.5 | U2.23 16.51,65.75 16.75,65.5 | 16.75,65.5 17.27,64.98 18.82,64.98 19.03,65.19 U3.1
  Top 0.305: U3.1 19.03,66.04 19.5,66.5 26,66.5 26.75,65.75 R13.1
EN  (via drill 0.35, 0.35 pad 0.4)
  Top 0.305: U$1.10 35.92,121.67 36.5,122.25 v36.5,124.25 36.53,124.22 U1.3 | U3.3 17.75,65.56 17.75,66.25 19.1,67.6 23.1,67.6 v23.5,68 28,68 29.25,66.75 v31.25,66.75 31.29,66.71 35.03,66.71 35.75,65.98 R12.1 R10.1
  Bottom 0.305: v23.5,68 38.25,82.75 38.25,116 41.5,119.25 41.5,122.71 39.96,124.25 v36.5,124.25 | PAD6.1 v31.25,66.75
ETHER_CS
  Top 0.305: U$1.9 35.59,120.41 36,120 36,118.5 36.63,117.87 U1.8
ETHER_INT
  Top 0.305: U$1.4 35.8,114.06 36.75,115 36.75,115.75 37.6,116.6 U1.9
GND  (via drill 0.35, 0.35 pad 0.4)
  Top 0.305: U$1.21 23.04,119.13 U$3.4 | 8.56,71.28 J2.A12 8.87,71.59 J2.B1 8.25,71.59 8.56,71.28 | 8.56,71.28 J2.S2 | 8.5,77.69 J2.A1 8.56,78.1 | 8.5,77.69 8.25,77.69 | 8.25,77.69 7.77,77.69 J2.B12 | 8.56,78.1 J2.S1 | 8.5,78.04 8.25,77.79 8.25,77.69 | 8.56,78.1 8.5,78.04 | 8.5,78.04 8.5,77.69 | U2.2 14.75,65.75 U2.25 | U2.2 14.75,68 | U2.2 14.79,67.09 14.79,67.63 14.97,67.81 15.51,67.81 15.95,68.25 16.25,68.25 16.5,68.5 16.5,70.5 15.77,71.23 D1.1
  Top 1.016: U$9.P$15 U$9.P$16
  other vias: 25,100 23,122.5 20.65,117.4 20.65,116 40.5,82.25 42,82.25 42,80 38.75,80 41.4,115.45 46.8,115.45 44.15,112.6 47.75,107.5 47.75,106.05 54.45,114 54.5,112.65 41.05,124.35 41.25,117.75 53.15,125.25 40.05,119.2 36.3,117.05 37.15,120 36.75,113.1 40.45,111 42,109.6 48.45,104.5 53.15,109.15 54.45,106.5 49.55,101.5 32.7,114.55 29.3,110.95 27.4,109.2 40.5,91.75 42,93.75 2.5,112 2.75,102.75 15.25,113.75 19,101 51.5,126.5 40.75,126.25 29.25,133.75 21.5,133.75 28,127.25 29.25,123.25 24,96.75 25,62.9 49.25,71 45,70.9 39.5,65.5 44.75,66 47.5,62.25 38.5,62 29,85 29,87 24,85.25 24,82.75 28,94.5 21.75,91.25 29,91.25 34.25,97.25 31,97.25 24,77.5 24,72.75 15.5,73.25 26.85,124.8 8,128.25 9.25,123.75 18.5,117.75 13,123.5 14.75,117.5 20.25,104.25 19.75,96.5 21.75,98.5 52,72 49.5,80 51.85,79.7 51,82.25 14.75,78.5 17.25,75.25 26.75,119.5 20.25,126.25 20.25,129.25 23,128.75 46,121.75 41.25,102.5 42.25,68.25 45.5,76.75 29.25,68.75 12,74.25
  pour Top (isolate 0.16, no thermals): 0,135.75 37.25,135.75 37.25,127.75 38,127 61.25,127 61.25,60.5 0,60.5
  pour Bottom (no thermals): 36.75,135.5 36.5,135.75 0,135.75 0,60.5 60.25,60.5 60.25,127.25 38,127.25 37.25,128 37.25,135.5
GND_BRD  (via drill 0.6)
  Bottom 4: X17.3 26.29,29.76 | 26.29,29.76 C29.- 29.29,33.01 | 29.29,33.01 C30.- | 26.29,29.76 26.29,30.01 29.29,33.01 | C30.- 38.54,29.26 | 38.54,29.26 X16.3 | 38.54,29.26 40.79,31.51 40.79,36.58 | 40.79,36.58 40.79,45.58 | C30.- 37.21,33.01 40.79,36.58
  other vias: 39.54,44.33 42.04,44.33 40.79,45.33 41.79,46.33 39.79,46.33 41.79,31.08 40.54,29.83 41.79,32.83 40.29,31.58 38.79,30.33 39.29,28.83 40.79,34.08 42.04,35.33 37.04,31.58 41.29,40.33 41.29,38.83 41.29,37.08
  pour Top (no thermals): 0.29,0.58 58.54,0.58 58.54,57.33 0.29,57.33
HEADER_CS  (via drill 0.35 pad 0.4)
  Top 0.305: U1.35 v52.5,122.95 | v29.5,73 27.06,73 U$9.P$22 | v25.48,63.75 25.44,63.7 R1.1
  Bottom 0.305: v52.5,122.95 46.45,116.9 39.9,116.9 38.85,115.85 38.85,82.35 v29.5,73 24.75,68.25 24.75,64.48 v25.48,63.75
LEDA
  Top 0.305: R18.2 21.17,111.3 20.37,112.11 20.37,113.3 11.12,122.55 8.37,122.55 6.37,120.55 P1.L1
LEDB
  Top 0.305: R17.2 21.56,112.94 6.37,128.13 P1.L3
LEDS1_3V3  (via drill 0.35 pad 0.4)
  Top 0.305: U1.23 v54.25,107.71 | SN74HCT245DWR1.8 v49.25,89.92
  Bottom 0.305: v54.25,107.71 48.5,101.96 48.5,90.67 v49.25,89.92
LEDS1_5V
  Top 0.305: U$9.P$1 R7.2
LEDS1_5V_BRD
  Top 0.305: U$14.P$12 37.54,26.58 40.54,23.58 40.54,18.58 31.04,9.08 28.79,9.08 27.54,7.83 X13.2
LEDS2_3V3  (via drill 0.35 pad 0.4)
  Top 0.305: U1.24 v54.25,108.98 | SN74HCT245DWR1.6 v49.25,87.39
  Bottom 0.305: v54.25,108.98 48,102.73 48,88.64 v49.25,87.39
LEDS2_5V
  Top 0.305: R4.2 U$9.P$2
LEDS2_5V_BRD
  Top 0.305: U$14.P$11 36.79,28.58 41.29,24.08 41.29,18.33 39.29,16.33 X14.2
LEDS3_3V3  (via drill 0.35 pad 0.4)
  Top 0.305: SN74HCT245DWR1.5 v49.25,86.11 | v54.25,111.5 56.04,111.5 U1.26
  Bottom 0.305: v54.25,111.5 47.5,104.75 47.5,87.86 v49.25,86.11
LEDS3_5V
  Top 0.305: R26.2 U$9.P$3
LEDS3_5V_BRD
  Top 0.305: U$14.P$10 36.04,30.58 42.04,24.58 42.04,18.58 51.04,9.58 X15.2
LEDS4_3V3  (via drill 0.35 pad 0.4)
  Top 0.305: SN74HCT245DWR1.3 v49.25,83.58 | v54.5,115.27 56,115.27 U1.29
  Bottom 0.305: v54.5,115.27 47,107.77 47,85.83 v49.25,83.58
LEDS4_5V
  Top 0.305: R27.2 U$9.P$4
LEDS4_5V_BRD
  Top 0.305: U$14.P$9 29.54,31.08 29.54,26.08 30.79,24.83 34.04,24.83 35.04,23.83 X16.2
LEDS5_3V3  (via drill 0.35 pad 0.4)
  Top 0.305: SN74HCT245DWR1.2 v49.25,82.31 | v54.5,116.58 56.04,116.58 U1.30
  Bottom 0.305: v54.5,116.58 46.5,108.58 46.5,85.06 v49.25,82.31
LEDS5_5V
  Top 0.305: R28.2 U$9.P$5
LEDS5_5V_BRD
  Top 0.305: U$14.P$8 29.78,34.58 28.54,33.33 28.54,25.83 27.54,24.83 23.54,24.83 22.79,24.08 X17.2
LEDS6_3V3  (via drill 0.35 pad 0.4)
  Top 0.305: SN74HCT245DWR.9 v49.25,77.19 | U1.31 54.52,117.87 v54.5,117.85
  Bottom 0.305: v54.5,117.85 46,109.35 46,80.44 v49.25,77.19
LEDS6_5V
  Top 0.305: U$9.P$6 R29.2
LEDS6_5V_BRD
  Top 0.305: X18.2 50.69,31.96 51.79,33.06 51.79,40.58 50.79,41.58 37.54,41.58 32.53,36.58 U$14.P$7
LEDS7_3V3  (via drill 0.35 pad 0.4)
  Top 0.305: SN74HCT245DWR.8 v49.25,75.92 | v54.5,120.37 54.54,120.41 U1.33
  Bottom 0.305: v54.5,120.37 54.5,119.62 45.5,110.62 45.5,79.67 v49.25,75.92
LEDS7_5V
  Top 0.305: R25.2 U$9.P$7
LEDS7_5V_BRD
  Top 0.305: X19.2 37.54,43.33 32.78,38.58 U$14.P$6
LEDS8_3V3  (via drill 0.35 pad 0.4)
  Top 0.305: SN74HCT245DWR.7 v49.25,74.66 | v54.5,124.16 56,124.16 U1.36
  Bottom 0.305: v54.5,124.16 53.75,123.41 53.75,119.91 45,111.16 45,78.91 v49.25,74.66
LEDS8_5V
  Top 0.305: R30.2 U$9.P$8
LEDS8_5V_BRD
  Top 0.305: U$14.P$5 30.03,41.58 19.79,41.58 10.16,31.96 X20.2
LEDS9_3V3  (via drill 0.35 pad 0.4)
  Top 0.305: SN74HCT245DWR.6 v45,73.39 | v54.5,125.47 56.04,125.47 U1.37
  Bottom 0.305: v54.5,125.47 53.2,124.17 53.2,120.42 44.5,111.72 44.5,73.89 v45,73.39
LEDS9_5V
  Top 0.305: R5.2 U$9.P$9
LEDS9_5V_BRD
  Top 0.305: U$14.P$4 30.03,43.58 8.39,43.58 X21.2
LEDS10_3V3  (via drill 0.35 pad 0.4)
  Top 0.305: SN74HCT245DWR.5 v45,72.11 | U1.10 v40.25,115.33
  Bottom 0.305: v40.25,115.33 44,111.58 44,73.12 v45,72.11
LEDS10_5V
  Top 0.305: R6.2 U$9.P$10
LEDS10_5V_BRD
  Top 0.305: U$14.P$3 32.28,44.58 32.79,45.08 32.79,49.33 30.54,51.58 30.54,54.33 32.04,55.83 38.79,55.83 40.54,54.08 X22.2
LEDS11_3V3  (via drill 0.35 pad 0.4)
  Top 0.305: SN74HCT245DWR.3 v45,69.58 | U1.11 v40.25,114.06
  Bottom 0.305: v40.25,114.06 43.5,110.81 43.5,71.08 v45,69.58
LEDS11_5V
  Top 0.305: U$9.P$11 R8.2
LEDS11_5V_BRD
  Top 0.305: X23.2 16.79,54.33 18.04,55.58 25.79,55.58 27.04,54.33 27.04,51.58 29.54,49.08 29.54,46.83 29.79,46.58 U$14.P$2
LEDS12_3V3  (via drill 0.35 pad 0.4)
  Top 0.305: SN74HCT245DWR.2 v45,68.31 | U1.12 v40.25,112.79
  Bottom 0.305: v45,68.31 43,70.31 43,110.04 v40.25,112.79
LEDS12_5V
  Top 0.305: R9.2 U$9.P$12
LEDS12_5V_BRD
  Top 0.305: U$14.P$1 31.04,49.58 28.79,51.83 X24.2
LEFT_CHANNEL
  Top 0.305: R21.2 18.08,86.58 18.55,87.05 U4.14
LRCK  (via drill 0.35)
  Top 0.305: U1.4 v40.25,122.95 | v22.43,84.18 22.43,82.71 U4.7
  Bottom 0.305: v40.25,122.95 32.75,122.95 19.06,109.25 13.76,109.25 12.04,107.54 12.04,94.56 12.05,94.56 v22.43,84.18
MISO  (via drill 0.35 pad 0.4)
  Top 0.2: U$2.SDDATA0 22.43,105.67
  Top 0.305: U1.14 38.39,110.2 v36,110.2 | 22.43,105.67 v22.5,105.75 | v29.5,79 27.06,79 U$9.P$19 | U$1.6 32.67,116.59 v32.63,116.63
  Bottom 0.305: v29.5,79 36,85.5 v36,110.2 35.25,110.95 35.25,114.02 v32.63,116.63 32.63,115.86 22.5,105.72 v22.5,105.75
MOSI  (via drill 0.35 pad 0.4)
  Top 0.2: U$2.SDCMD 21.82,107.28 22.39,107.84 v23.5,107.84
  Top 0.305: U1.16 v36.75,107.71 | v32.63,117.9 34.41,117.9 U$1.7 | v29.5,77 27.06,77 U$9.P$20
  Bottom 0.305: v23.5,107.84 31.88,116.22 31.88,117.15 v32.63,117.9 36,114.53 36,111.21 36.75,110.46 v36.75,107.71 36.75,84.25 v29.5,77
N$1
  Top 0.305: SN74HCT245DWR.18 36.33,69.58 35.75,69 R9.1
N$2
  Top 0.305: C2.1 C4.1 18.6,81 19.2,81.6 U4.2
N$3
  Top 0.305: C22.1 12.15,77.6 11.41,78.34 C20.1 9,81.83 J1.3
N$4
  Top 0.305: C23.1 11.75,90.72 | 11.75,90.72 10.6,90.72 10.59,90.73 C21.1 10.6,91.68 10.6,91.5 | J1.2 10.6,90.25 10.6,90.44 | 10.6,90.44 10.6,91 | 10.6,91 10.6,91.5 | 11.75,90.72 11.49,90.99 | 11.49,90.99 10.97,91.5 10.6,91.5 | 11.49,90.99 11.15,90.99 | 11.15,90.99 10.61,90.99 10.6,91 | 10.6,90.44 11.15,90.99
N$5  (via drill 0.35 pad 0.4)
  Top 0.305: C1.1 v11.76,68.51 v11.75,68.5 12.75,67.5 U2.6 | v17.25,68.5 17.25,69.9 18.09,70.75 C8.1
  Bottom 0.305: v11.75,68.5 v17.25,68.5
N$6
  Top 0.305: SN74HCT245DWR1.12 36.45,91.19 36.25,91 R7.1
N$7
  Top 0.305: U3.2 18.38,66.13 19.25,67 27.42,67 28.75,65.67 R11.1
N$8
  Top 0.305: U3.5 18.38,62.62 18.8,62.2 25.95,62.2 26.75,63 R13.2
N$9
  Top 0.305: R10.2 38.55,63.2 39,62.75 40.2,62.75 U$7.P$3
N$10
  Top 0.305: SN74HCT245DWR1.18 36.33,83.58 35.75,83 R28.1
N$11
  Top 0.305: SN74HCT245DWR.15 36.38,73.39 36,73 R6.1
N$12
  Top 0.305: SN74HCT245DWR.14 36.34,74.66 36,75 R5.1
N$13
  Top 0.305: SN74HCT245DWR1.17 36.41,84.84 36.25,85 R27.1
N$14
  Top 0.305: SN74HCT245DWR.17 35.2,70.84 R8.1
N$15
  Top 0.305: SN74HCT245DWR1.15 36.63,87.39 36.25,87 R26.1
N$16
  Top 0.305: C22.2 R20.1
N$17
  Top 0.305: C15.2 C16.2 17.85,77.9 17.35,78.4 17.35,80.75 18.55,81.95 U4.1
N$18
  Top 0.2: U2.21 16.8,64.75 16.92,64.63 19.78,64.63 20.62,65.47 R14.1
N$19
  Top 0.508: U$1.1 34.45,108.78 C11.1 34.43,106.02 C18.1
N$20  (via drill 0.35 pad 0.4)
  Top 0.305: U$1.14 v32.5,126.75 | v28.5,132.25 R16.1
  Bottom 0.305: v32.5,126.75 28.5,130.75 v28.5,132.25
N$21
  Top 0.305: U$1.24 23.8,115.33 23.55,115.08 C12.1 23.05,114.8 22.5,114.25 21,114.25 19.75,115.5 19.75,117.75 21.05,119.05 U$3.1
N$22
  Top 0.305: U$1.23 23.24,116.59 C17.1 22.95,116.49 U$3.3
N$23
  Top 0.305: U$1.26 23.41,112.78 R17.1
N$24
  Top 0.305: C23.2 19.2,90.47 18.53,89.8 16.38,89.8 R21.1
N$25
  Top 0.305: U$1.27 23.48,111.52 R18.1
N$26
  Top 0.2: SN74HCT245DWR.11 37.58,78.47
  Top 0.305: SN74HCT245DWR.11 36.78,78.47 36,79.25 36,80.5 35.5,81 R29.1
N$27
  Top 0.305: SN74HCT245DWR1.14 36.59,88.66 36.25,89 R4.1
N$28
  Top 0.305: U2.9 11.25,65.25 10.38,64.38 R2.1
N$30
  Top 0.305: 21.15,89.25 U4.10 21.15,89.05 20.95,89.25 | 21.15,89.25 21.15,89.73 | 21.15,89.73 21.54,90.13 R19.1 | 20.25,89.25 20.1,89.25 19.85,89 U4.12 | 20.25,89.25 20.5,89 | 20.5,89 U4.11 20.5,89.25 | 20.25,89.25 20.5,89.25 | 20.5,89.25 20.75,89.25 | 21.15,89.25 20.95,89.25 | 20.95,89.25 20.75,89.25 | 20.75,89.25 20.5,89 | 20.75,89.25 20.75,89.33 21.15,89.73
N$31
  Top 0.305: C26.1 26.42,130.03 R23.2 28.14,129.97 R24.1
N$32
  Top 0.305: C19.1 21.66,123.98 R15.1 R22.2
N$34
  Top 0.305: SN74HCT245DWR.13 36.58,75.92 35.5,77 R30.1
N$35
  Top 0.305: SN74HCT245DWR.12 36.55,77.19 35.05,78.7 R25.1
RIGHT_CHANNEL
  Top 0.305: R20.2 16,85 16.25,85.25 17.75,85.25 19.2,86.7 U4.13 19.2,89.12 20.25,90.17 20.25,91.25 18,93.5 J3.1
RTS
  Top 0.305: U2.19 17.62,63.75 U3.4 17.73,62.27 18.3,61.7 27.12,61.7 28.75,63.33 R11.2
RX0  (via drill 0.35 pad 0.4)
  Top 0.305: U1.34 v52.5,121.68 | v25.45,65.17 25.16,65.47 R14.2
  Bottom 0.305: v52.5,121.68 47.07,116.25 40,116.25 39.5,115.75 39.5,82 25.45,67.95 v25.45,65.17 27.25,65.17 PAD4.1
SCK  (via drill 0.35 pad 0.4)
  Top 0.2: U$2.SDCLK 21.82,106.08 v22.75,107
  Top 0.305: U1.13 v37,111.52 | v32.63,119.17 34.41,119.17 U$1.8 | v29.5,75 27.06,75 U$9.P$21
  Bottom 0.305: 37.5,112.02 37.24,111.76 | 37.5,112.02 37.5,114.27 32.63,119.14 v32.63,119.17 31.13,117.67 31.13,116.44 22.75,108.06 v22.75,107 | v29.5,75 37.5,83 37.5,110.5 37.5,111.02 | 37.24,111.76 37.24,111.28 | 37.24,111.28 37.5,111.02 | 37.24,111.76 v37,111.52 37.24,111.28 | 37.5,112.02 37.5,111.02
SCKI  (via drill 0.35)
  Top 0.305: U4.6 21.8,83.82 v21.12,84.5 | U3.6 19.03,63.14 19.24,62.93 v20,62.93 | U1.25 v54.25,110.25
  Bottom 0.305: v54.25,110.25 55.25,110.25 56.75,111.75 56.75,125.25 55.65,126.35 52.99,126.35 51.99,125.35 52,125.35 51.78,125.13 34.13,125.13 18.81,109.81 13.56,109.81 11.44,107.69 11.44,94.17 v21.12,84.5 20,83.38 v20,62.93 20.05,62.88 23.13,62.88 23.75,63.5 PAD5.1
SD_CMD
  Top 0.2: U$2.CMD 18.98,107.28 18.3,107.95 J5.3
SD_CS  (via drill 0.35 pad 0.4)
  Top 0.2: U$2.SDDATA3 21.38,107.67 v22.45,108.75
  Top 0.305: U1.7 v36.75,119.14
  Bottom 0.305: v36.75,119.14 35.89,120 32.35,120 30.5,118.15 30.5,116.8 v22.45,108.75
SD_D0
  Top 0.2: U$2.DATA0 19.2,105.67 18.45,104.93 18.45,103.95 18.05,103.55 J5.7
SD_D1
  Top 0.2: U$2.DATA1 19.45,105.3 18.95,104.8 18.95,103.2 18.2,102.45 J5.8
SD_D2
  Top 0.2: U$2.DATA2 19.55,108.08 18.75,108.87 18.75,109.5 18.1,110.15 J5.1
SD_D3
  Top 0.2: U$2.DATA3 19.21,107.67 18.4,108.49 18.4,108.85 18.2,109.05 J5.2
SD_SCK
  Top 0.2: U$2.CLK 18.95,106.08 18.62,105.75 J5.5
TPIN+  (via drill 0.35 pad 0.4)
  Top 0.305: 29.55,128.35 v29.59,128.32 28.21,128.32 R24.2 | U$1.13 v32.25,125.48
  Bottom 0.305: P1.R7 19,122.2 19.75,122.95 19.75,124.25 24.62,129.12 28.78,129.12 v29.59,128.32 32.25,125.66 v32.25,125.48
TPIN-  (via drill 0.35 pad 0.4)
  Top 0.305: v25.14,128.32 25.2,128.38 R23.1 | U$1.12 31.95,124.22 31.5,124.66 v31.5,124.72
  Bottom 0.305: P1.R8 20.39,122.68 20.39,123.95 24.75,128.32 v25.14,128.32 28.39,128.32 31.5,125.21 v31.5,124.72
TPOUT+
  Top 0.305: U$1.17 23.96,124.22 23.75,124 R15.2 22.75,124 22.5,124.25 22.5,126.5 21.75,127.25 18,127.25 16.1,129.15 P1.R1
TPOUT-
  Top 0.305: U$1.16 24.02,125.48 23.72,125.78 R22.1 23.27,126.48 21.75,128 19.19,128 P1.R2
TX_CONTROLLER  (via drill 0.35)
  Top 0.2: R1.2 v20.75,63.7 20.38,63.7 19.83,64.25 U2.20
  Bottom 0.2: PAD3.1 21.2,63.7 v20.75,63.7
VDD3V3  (via drill 0.35, 0.35 pad 0.4)  (1 unrouted)
  Top 0.2: J5.4 17.14,106.88 U$2.VCC | v34.25,62.25 34.27,62.23
  Top 0.305: U$1.15 23.75,126.75 21.75,128.75 L1.1 | U$9.P$18 27.15,81.33 25.33,81.33 | 24.67,81.33 25,81.33 | 25,81.33 25.33,81.33 | v28.75,70 25.75,70 25,70.75 25,81 | 25,81 25,81.33 | J3.3 v15.25,95.5 | v34.25,62.25 35.5,62.25 35.75,62.5 R12.2 | 25,81 25.33,81.33 | 25,81 24.67,81.33 | 24.67,81.33 23.58,81.33 23.25,81 C14.1 C10.1 21.48,80.15 20.5,81.13 U4.4
  Top 0.508: 5V_TO_3V3_REGULATOR.2 32.5,98 | U1.2 37.26,125.49 v36.75,126 36.4,126.35 C27.1 36.5,128.6 36.5,131.16 C13.1 36.28,131.38 | U$9.P$17 28.79,83.05 v28.87,83.13 | J5.4 v15,106.85 | U$1.19 25.13,121.75 27.5,121.75 | v28,121.75 27.5,121.75 | v28,121.75 28,121.25 | 28,121.25 28,120.91 | 28,120.91 28,120.5 | 28,120.5 28,120 | 28,120 28,119.91 | 28,119.91 28,114.5 | 28,114.11 28,114 | 28,114 28,113.56 | 28,110.75 28,113.56 | U$1.15 26.5,126.75 28,125.25 28,122.25 | 28,122.25 v28,121.75 | U$1.28 27.5,110.25 | C6.1 37.25,98.5 33,98.5 | U$1.20 27.5,120.41 | 27.59,120.41 27.91,120.41 28,120.5 | U$1.25 27.5,114.06 | 27.95,114.06 27.5,114.06 | 27.95,114.06 28,114 | 27.5,114.06 28,113.56 | 27.95,114.06 28,114.11 | 28,114.11 28,114.5 | 27.5,114.06 27.95,114.5 28,114.5 | 27.5,110.25 28,110.75 | 28,110.75 v28,110.25 27.5,110.25 | 27.5,121.75 28,121.25 | 27.5,121.75 28,122.25 | 27.5,120.41 27.59,120.41 | 27.59,120.41 28,120 | 27.5,120.41 28,120.91 | 27.5,120.41 28,119.91 | 32.5,98 33,98.5 | 33,98.5 v32.5,98.5 32.5,98
  Top 1.016: U$9.P$17 U$9.P$18
  Bottom 0.2: PAD1.1 33.25,63.25
  Bottom 0.305: 33.25,63.25 v34.25,62.25 | PAD1.1 33.25,66.5 29.75,70 v28.75,70 | v15.25,95.5 20.35,95.5 23.05,98.2 | 23.05,98.2 23.05,98.8 22.92,98.92 | 23.35,98.5 23.05,98.2
  Bottom 0.508: v32.5,98.5 32.5,98 | 32.5,98 32.5,86.76 v28.87,83.13 | v36.75,126 34,126 29.75,121.75 v28,121.75 | v28,110.25 32.5,105.75 32.5,99 | 32.5,99 v32.5,98.5 | v32.5,98.5 32,98.5 | 32,98.5 23.35,98.5 22.92,98.92 v15,106.85 | 32,98.5 32.5,99 | 32,98.5 32.5,98
VDD3V3_BRD  (1 unrouted)
VDD5V  (via drill 0.35, 0.35 pad 0.4)
  Top 0.305: v21.21,77.85 20.8,77.85 19.9,78.75 C2.2 C4.2 19.85,80.3 U4.3 | D2.C 18.08,74.58 17,73.5 v17,72.75 | v11.75,61.89 11.19,62.45 R2.2 | 36.5,95.23 36.95,94.78 37.28,94.78 | 34.89,95.23 C3.1 | 50.7,71.5 50.7,70.5 | 51,70.5 C24.1 51.2,70.5 50.95,70.75
  Top 0.508: 51.25,81.05 C5.1 53.2,84.84 C9.1 | 51.25,81.05 50.25,81.05 | 50.25,81.05 47.2,81.05 | 47.2,81.05 46.75,81.05 | 46.75,81.05 46,81.05 45.52,81.53 | 50.7,71.25 50.7,70.5 51,70.5 51.45,70.5 | 50.7,71.25 50.7,71.5 50.7,80.5 | 50.95,70.75 50.95,70.7 49.25,69 49.25,67.78 48.5,67.03 SN74HCT245DWR.1 SN74HCT245DWR.20 | C25.1 53.7,73.79 C24.1 51.45,70.5 | 45.52,81.53 45.02,82.03 | 45.02,82.03 43.75,83.3 43.75,90.25 38.82,95.18 37.68,95.18 37.28,94.78 | 37.28,94.78 37,94.5 | 37,94.5 35.53,93.03 28.03,93.03 27,92 U$9.P$13 | v21.21,77.85 21.21,75.13 20.67,74.58 D2.C | 50.7,71.25 51.45,70.5 | v29,89 27.05,89 U$9.P$14 | SN74HCT245DWR1.1 47.2,81.05 | SN74HCT245DWR1.20 45,81.03 | 45,81.03 46.73,81.03 46.75,81.05 | 45.52,81.53 45.49,81.53 45,81.03 | 45,81.03 45,82 45.02,82.03 | 36.98,95.23 C3.1 37.28,94.93 | 36.98,95.23 36.75,95.23 | 5V_TO_3V3_REGULATOR.3 34.89,95.23 36.5,95.23 36.75,95.23 | 37.28,94.93 36.98,95.23 | 37.28,94.93 37.28,94.78 | 36.98,95.23 36.98,95 | 36.98,95 36.98,94.52 37,94.5 | 36.75,95.23 36.98,95 | 50.7,80.5 51.25,81.05 | 50.7,80.5 50.25,80.95 50.25,81.05
  Top 1.016: U$9.P$14 U$9.P$13
  Bottom 0.2: 11.78,61.87 v11.75,61.89
  Bottom 0.305: v17,72.75 17,70.75 18.5,69.25 18.5,63.12 17.25,61.87 11.78,61.87
  Bottom 0.508: v29,89 25.21,85.21 25.21,81.85 v21.21,77.85
VDD5V_BRD  (2 unrouted)
  pour Bottom (no thermals): 0.29,0.58 58.54,0.58 58.54,57.33 0.29,57.33
VDD5VUSB  (via drill 0.35 pad 0.4)
  Top 0.305: J2.B9 8.19,75.94 8.44,76.19 J2.A4 v10.65,76.19 | J2.B4 8.1,73.44 8.35,73.19 J2.A9 | 9.56,73.19 J2.A9 | U2.8 v10.65,65.75 | J2.A9 10.62,73.19 v10.65,73.2 | v13,73.2 13.51,72.69 D1.2
  Top 0.508: D2.A 14.38,74.58 v14.36,74.6 12.77,76.19 v10.65,76.19
  Bottom 0.305: 14.36,74.56 v14.36,74.6
  Bottom 0.508: 14.36,74.56 v13,73.2 11.2,73.2 | 11.2,73.2 v10.65,73.2 | v10.65,76.19 10.65,73.75 | 10.65,73.75 v10.65,73.2 | v10.65,73.2 10.65,72.65 | 10.65,72.65 v10.65,65.75 | 10.65,73.75 11.2,73.2 | 11.2,73.2 10.65,72.65
(copper drawn outside any net)
  shapes: Top area x3